# EAGLE board ROM-Adapter1b (EAGLE 9.6.2)
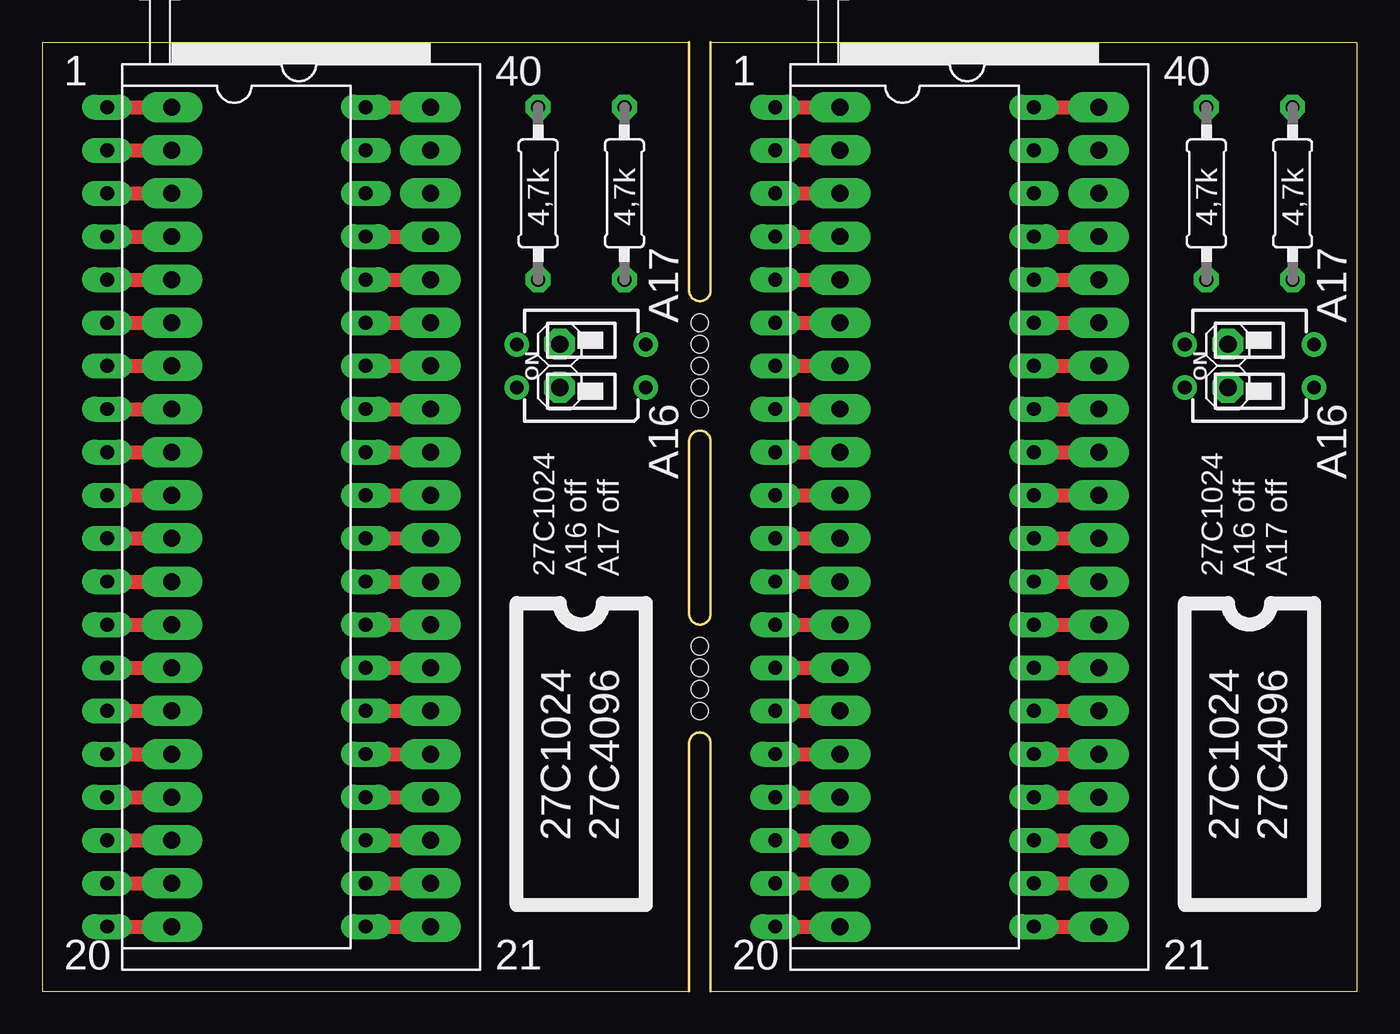
[diagram p0: board, top side]
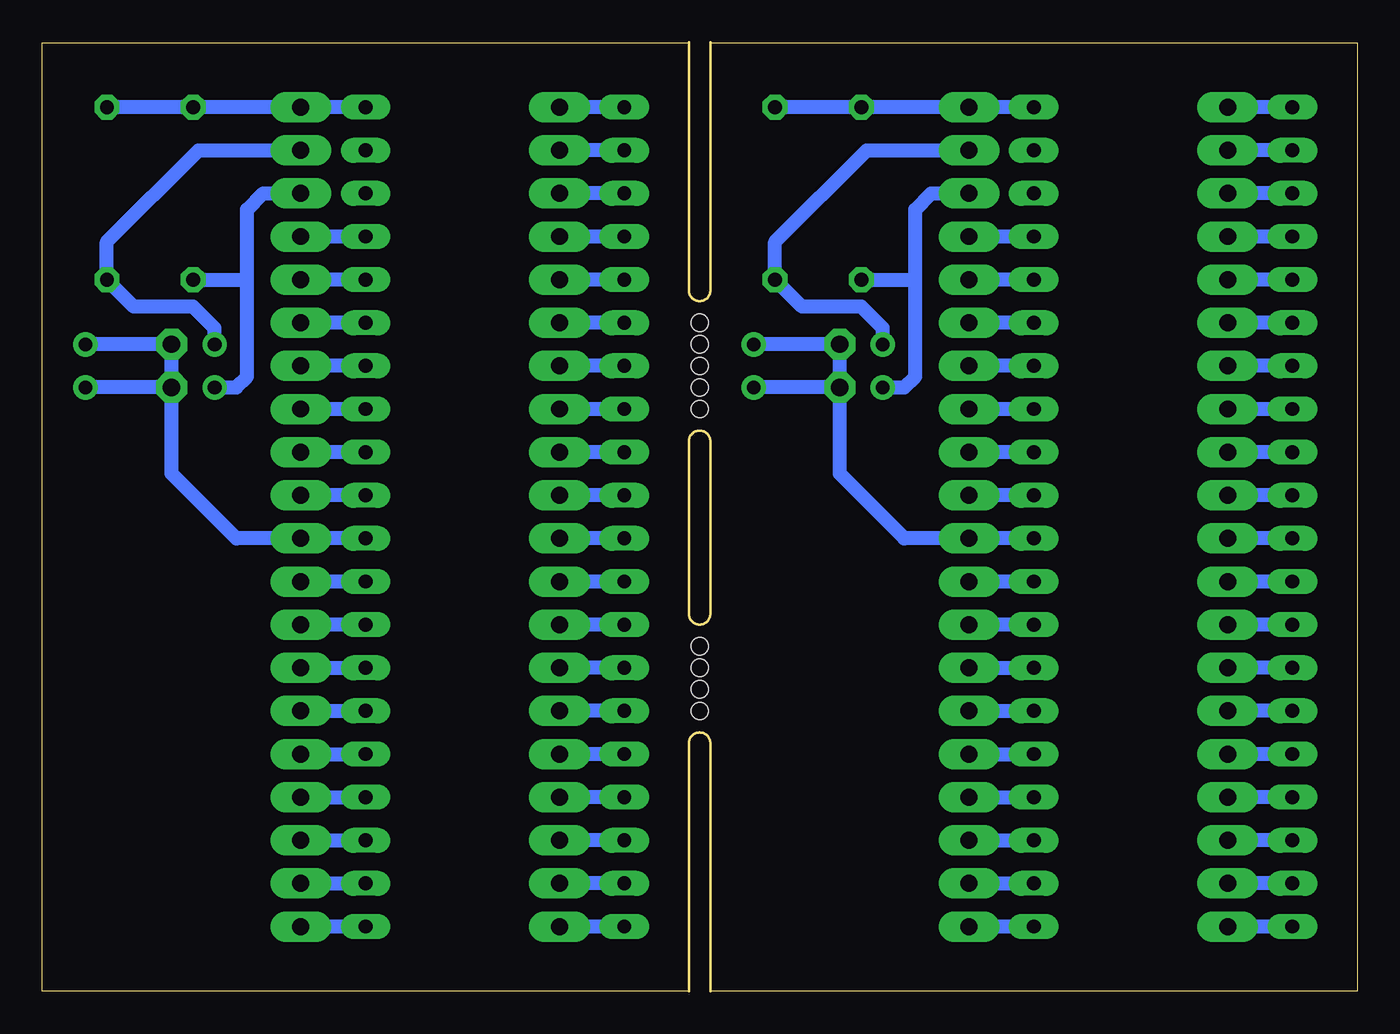
[diagram p1: board, bottom side, seen from below]

Size 77.46 x 55.88 mm. Coordinates in mm from the lower left corner, seen from the top.
Outline: 38.09,0 0,0 0,55.87 38.09,55.87
Outline: 39.37,55.87 77.46,55.87 77.46,0 39.37,0 39.37,14.61 arc180 38.1,14.61 38.1,0
Outline: 38.1,55.88 38.1,41.27 arc180 39.37,41.27 39.37,55.88
Outline: 39.37,22.23 arc-180 38.1,22.23 38.1,32.38 arc-180 39.37,32.38 39.37,22.23
Copper layers (1*16): Top 0.035mm / dielectric 1.6mm / Bottom 0.035mm
Design rules "jlcpcb-2layers": minimum track width 5mil, minimum drill 0.3mm, track to track 5mil, track to pad 5mil, pad to pad 5mil, via to via 5mil, smd to smd 5mil, copper to edge 0.2mm, drill to drill 6mil, minimum pad ring 10mil, minimum via ring 3mil, stop-mask expansion 4mil, vias tented up to drill 0mil, thermal gap 10mil
Holes 1 mm at 38.73,16.51 38.73,17.78 38.73,19.05 38.73,20.32 38.73,39.37 38.73,38.1 38.73,36.83 38.73,35.56 38.73,34.29

## Footprints (pad centres in the part's own frame; a part is rotated, then mirrored left to right if it is on the bottom)
DIL40 = drill 0.813 long: 1 -24.13,-7.62; 2 -21.59,-7.62; 3 -19.05,-7.62; 4 -16.51,-7.62; 5 -13.97,-7.62; 6 -11.43,-7.62; 7 -8.89,-7.62; 8 -6.35,-7.62; 9 -3.81,-7.62; 10 -1.27,-7.62; 11 1.27,-7.62; 12 3.81,-7.62; 13 6.35,-7.62; 14 8.89,-7.62; 15 11.43,-7.62; 16 13.97,-7.62; 17 16.51,-7.62; 18 19.05,-7.62; 19 21.59,-7.62; 20 24.13,-7.62; 21 24.13,7.62; 22 21.59,7.62; 23 19.05,7.62; 24 16.51,7.62; 25 13.97,7.62; 26 11.43,7.62; 27 8.89,7.62; 28 6.35,7.62; 29 3.81,7.62; 30 1.27,7.62; 31 -1.27,7.62; 32 -3.81,7.62; 33 -6.35,7.62; 34 -8.89,7.62; 35 -11.43,7.62; 36 -13.97,7.62; 37 -16.51,7.62; 38 -19.05,7.62; 39 -21.59,7.62; 40 -24.13,7.62
MEMORY-HITACHI_ZIF40 = drill 1 long: 1 -24.13,-7.62; 2 -21.59,-7.62; 3 -19.05,-7.62; 4 -16.51,-7.62; 5 -13.97,-7.62; 6 -11.43,-7.62; 7 -8.89,-7.62; 8 -6.35,-7.62; 9 -3.81,-7.62; 10 -1.27,-7.62; 11 1.27,-7.62; 12 3.81,-7.62; 13 6.35,-7.62; 14 8.89,-7.62; 15 11.43,-7.62; 16 13.97,-7.62; 17 16.51,-7.62; 18 19.05,-7.62; 19 21.59,-7.62; 20 24.13,-7.62; 21 24.13,7.62; 22 21.59,7.62; 23 19.05,7.62; 24 16.51,7.62; 25 13.97,7.62; 26 11.43,7.62; 27 8.89,7.62; 28 6.35,7.62; 29 3.81,7.62; 30 1.27,7.62; 31 -1.27,7.62; 32 -3.81,7.62; 33 -6.35,7.62; 34 -8.89,7.62; 35 -11.43,7.62; 36 -13.97,7.62; 37 -16.51,7.62; 38 -19.05,7.62; 39 -21.59,7.62; 40 -24.13,7.62
1X01 = drill 1.016 octagon: 1 0,0
0207/10 = drill 0.813 octagon: 1 -5.08,0; 2 5.08,0
DIPSWITCH-02-209-2LPST = drill 0.8: 1 -1.27,-3.81; 2 1.27,-3.81; 3 1.27,3.81; 4 -1.27,3.81

## Placement (x,y rotation side)
IC1  Sockel40  [DIL40]  50.8,27.94 270 top
IC2  ZIF40  [MEMORY-HITACHI_ZIF40]  54.61,27.94 270 top
IC3  Sockel40  [DIL40]  11.43,27.94 270 top
IC4  ZIF40  [MEMORY-HITACHI_ZIF40]  15.24,27.94 270 top
JP1  [1X01]  30.48,38.1 0 top
JP2  [1X01]  30.48,35.56 0 top
JP3  [1X01]  69.85,38.1 0 top
JP4  [1X01]  69.85,35.56 0 top
R1  4,7k  [0207/10]  29.21,46.99 270 top
R2  4,7k  [0207/10]  34.29,46.99 270 top
R3  4,7k  [0207/10]  68.58,46.99 270 top
R4  4,7k  [0207/10]  73.66,46.99 270 top
S1  DIP-02-PTH-100MIL  [DIPSWITCH-02-209-2LPST]  31.75,36.83 90 top
S2  DIP-02-PTH-100MIL  [DIPSWITCH-02-209-2LPST]  71.12,36.83 90 top

## Library data of the parts
IC1 IC3 = memory-hitachi; OC_FARNELL: unknown; OC_NEWARK: unknown
IC2 IC4 = ROM-Adapter
JP1-JP4 = pinhead
R1-R4 = rcl; SPICEPREFIX: R
S1 S2 = SparkFun-Switches; PROD_ID: SWCH-12532

## Nets
N$1: IC3.21 IC4.21
N$2: IC3.22 IC4.22
N$3: IC3.23 IC4.23
N$4: IC3.24 IC4.24
N$5: IC3.25 IC4.25
N$6: IC3.26 IC4.26
N$7: IC3.27 IC4.27
N$8: IC3.28 IC4.28
N$9: IC3.29 IC4.29
N$10: IC3.31 IC4.31
N$11: IC3.32 IC4.32
N$12: IC3.33 IC4.33
N$13: IC3.34 IC4.34
N$14: IC3.35 IC4.35
N$15: IC3.36 IC4.36
N$16: IC3.37 IC4.37
N$17: IC3.20 IC4.20
N$18: IC3.2 IC4.2
N$19: IC4.38 R1.2 S1.4
N$20: IC3.19 IC4.19
N$21: IC3.18 IC4.18
N$22: IC3.17 IC4.17
N$23: IC3.16 IC4.16
N$24: IC3.15 IC4.15
N$25: IC3.14 IC4.14
N$26: IC3.13 IC4.13
N$27: IC3.12 IC4.12
N$28: IC3.10 IC4.10
N$29: IC3.9 IC4.9
N$30: IC3.8 IC4.8
N$31: IC3.7 IC4.7
N$32: IC3.6 IC4.6
N$33: IC3.5 IC4.5
N$34: IC3.4 IC4.4
N$35: IC3.3 IC4.3
N$36: IC4.39 R2.2 S1.3
N$37: IC3.1 IC4.1
N$38: IC3.40 IC4.40 R1.1 R2.1
N$39: IC1.21 IC2.21
N$40: IC3.11 IC4.11
N$41: IC1.22 IC2.22
N$42: IC3.30 IC4.30 JP1.1 JP2.1 S1.1 S1.2
N$43: IC1.23 IC2.23
N$44: IC1.24 IC2.24
N$45: IC1.25 IC2.25
N$46: IC1.26 IC2.26
N$47: IC1.27 IC2.27
N$48: IC1.28 IC2.28
N$49: IC1.29 IC2.29
N$50: IC1.31 IC2.31
N$51: IC1.32 IC2.32
N$52: IC1.33 IC2.33
N$53: IC1.34 IC2.34
N$54: IC1.35 IC2.35
N$55: IC1.36 IC2.36
N$56: IC1.37 IC2.37
N$57: IC1.20 IC2.20
N$58: IC1.2 IC2.2
N$59: IC1.19 IC2.19
N$60: IC1.18 IC2.18
N$61: IC1.17 IC2.17
N$62: IC1.16 IC2.16
N$63: IC1.15 IC2.15
N$64: IC1.14 IC2.14
N$65: IC1.13 IC2.13
N$66: IC1.12 IC2.12
N$67: IC1.10 IC2.10
N$68: IC1.9 IC2.9
N$69: IC1.8 IC2.8
N$70: IC1.7 IC2.7
N$71: IC1.6 IC2.6
N$72: IC1.5 IC2.5
N$73: IC1.4 IC2.4
N$74: IC1.3 IC2.3
N$75: IC1.1 IC2.1
N$76: IC1.40 IC2.40 R3.1 R4.1
N$77: IC1.11 IC2.11
N$78: IC2.38 R3.2 S2.4
N$79: IC2.39 R4.2 S2.3
N$80: IC1.30 IC2.30 JP3.1 JP4.1 S2.1 S2.2

## Tracks (layer width: path | path; a pad name or v marks a point on that pad's centre or on a via)
N$1
  Top 0.813: IC3.21 IC4.21
  Bottom 0.813: IC3.21 IC4.21
N$2
  Top 0.813: IC3.22 IC4.22
  Bottom 0.813: IC4.22 IC3.22
N$3
  Top 0.813: IC3.23 IC4.23
  Bottom 0.813: IC4.23 IC3.23
N$4
  Top 0.813: IC3.24 IC4.24
  Bottom 0.813: IC4.24 IC3.24
N$5
  Top 0.813: IC3.25 IC4.25
  Bottom 0.813: IC4.25 IC3.25
N$6
  Top 0.813: IC3.26 IC4.26
  Bottom 0.813: IC4.26 IC3.26
N$7
  Top 0.813: IC3.27 IC4.27
  Bottom 0.813: IC4.27 IC3.27
N$8
  Top 0.813: IC3.28 IC4.28
  Bottom 0.813: IC3.28 IC4.28
N$9
  Top 0.813: IC3.29 IC4.29
  Bottom 0.813: IC3.29 IC4.29
N$10
  Top 0.813: IC3.31 IC4.31
  Bottom 0.813: IC3.31 IC4.31
N$11
  Top 0.813: IC3.32 IC4.32
  Bottom 0.813: IC3.32 IC4.32
N$12
  Top 0.813: IC3.33 IC4.33
  Bottom 0.813: IC3.33 IC4.33
N$13
  Top 0.813: IC3.34 IC4.34
  Bottom 0.813: IC3.34 IC4.34
N$14
  Top 0.813: IC3.35 IC4.35
  Bottom 0.813: IC3.35 IC4.35
N$15
  Top 0.813: IC3.36 IC4.36
  Bottom 0.813: IC3.36 IC4.36
N$16
  Top 0.813: IC3.37 IC4.37
  Bottom 0.813: IC3.37 IC4.37
N$17
  Top 0.813: IC3.20 IC4.20
  Bottom 0.813: IC3.20 IC4.20
N$18
  Top 0.813: IC3.2 IC4.2
  Bottom 0.813: IC3.2 IC4.2
N$19
  Bottom 0.813: S1.4 26.67,35.56 26.04,36.2 26.04,41.91 | IC4.38 25.08,46.99 26.04,46.04 26.04,41.91 | R1.2 26.04,41.91
N$20
  Top 0.813: IC3.19 IC4.19
  Bottom 0.813: IC3.19 IC4.19
N$21
  Top 0.813: IC3.18 IC4.18
  Bottom 0.813: IC3.18 IC4.18
N$22
  Top 0.813: IC3.17 IC4.17
  Bottom 0.813: IC3.17 IC4.17
N$23
  Top 0.813: IC3.16 IC4.16
  Bottom 0.813: IC3.16 IC4.16
N$24
  Top 0.813: IC3.15 IC4.15
  Bottom 0.813: IC3.15 IC4.15
N$25
  Top 0.813: IC3.14 IC4.14
  Bottom 0.813: IC3.14 IC4.14
N$26
  Top 0.813: IC3.13 IC4.13
  Bottom 0.813: IC3.13 IC4.13
N$27
  Top 0.813: IC3.12 IC4.12
  Bottom 0.813: IC3.12 IC4.12
N$28
  Top 0.813: IC3.10 IC4.10
  Bottom 0.813: IC3.10 IC4.10
N$29
  Top 0.813: IC3.9 IC4.9
  Bottom 0.813: IC3.9 IC4.9
N$30
  Top 0.813: IC3.8 IC4.8
  Bottom 0.813: IC3.8 IC4.8
N$31
  Top 0.813: IC3.7 IC4.7
  Bottom 0.813: IC3.7 IC4.7
N$32
  Top 0.813: IC3.6 IC4.6
  Bottom 0.813: IC3.6 IC4.6
N$33
  Top 0.813: IC3.5 IC4.5
  Bottom 0.813: IC3.5 IC4.5
N$34
  Top 0.813: IC3.4 IC4.4
  Bottom 0.813: IC3.4 IC4.4
N$35
  Top 0.813: IC3.3 IC4.3
  Bottom 0.813: IC3.3 IC4.3
N$36
  Bottom 0.813: S1.3 27.94,39.05 29.21,40.32 32.7,40.32 R2.2 34.29,44.13 28.89,49.53 IC4.39
N$37
  Top 0.813: IC3.1 IC4.1
  Bottom 0.813: IC3.1 IC4.1
N$38
  Top 0.813: IC3.40 IC4.40
  Bottom 0.813: IC3.40 IC4.40 R1.1 R2.1
N$39
  Top 0.813: IC1.21 IC2.21
  Bottom 0.813: IC1.21 IC2.21
N$40
  Top 0.813: IC3.11 IC4.11
  Bottom 0.813: IC3.11 IC4.11
N$41
  Top 0.813: IC1.22 IC2.22
  Bottom 0.813: IC2.22 IC1.22
N$42
  Top 0.813: IC3.30 IC4.30
  Bottom 0.813: IC3.30 IC4.30 26.67,26.67 30.48,30.48 JP2.1 | JP2.1 JP1.1 S1.2 | JP2.1 S1.1
N$43
  Top 0.813: IC1.23 IC2.23
  Bottom 0.813: IC2.23 IC1.23
N$44
  Top 0.813: IC1.24 IC2.24
  Bottom 0.813: IC2.24 IC1.24
N$45
  Top 0.813: IC1.25 IC2.25
  Bottom 0.813: IC2.25 IC1.25
N$46
  Top 0.813: IC1.26 IC2.26
  Bottom 0.813: IC2.26 IC1.26
N$47
  Top 0.813: IC1.27 IC2.27
  Bottom 0.813: IC2.27 IC1.27
N$48
  Top 0.813: IC1.28 IC2.28
  Bottom 0.813: IC1.28 IC2.28
N$49
  Top 0.813: IC1.29 IC2.29
  Bottom 0.813: IC1.29 IC2.29
N$50
  Top 0.813: IC1.31 IC2.31
  Bottom 0.813: IC1.31 IC2.31
N$51
  Top 0.813: IC1.32 IC2.32
  Bottom 0.813: IC1.32 IC2.32
N$52
  Top 0.813: IC1.33 IC2.33
  Bottom 0.813: IC1.33 IC2.33
N$53
  Top 0.813: IC1.34 IC2.34
  Bottom 0.813: IC1.34 IC2.34
N$54
  Top 0.813: IC1.35 IC2.35
  Bottom 0.813: IC1.35 IC2.35
N$55
  Top 0.813: IC1.36 IC2.36
  Bottom 0.813: IC1.36 IC2.36
N$56
  Top 0.813: IC1.37 IC2.37
  Bottom 0.813: IC1.37 IC2.37
N$57
  Top 0.813: IC1.20 IC2.20
  Bottom 0.813: IC1.20 IC2.20
N$58
  Top 0.813: IC1.2 IC2.2
  Bottom 0.813: IC1.2 IC2.2
N$59
  Top 0.813: IC1.19 IC2.19
  Bottom 0.813: IC1.19 IC2.19
N$60
  Top 0.813: IC1.18 IC2.18
  Bottom 0.813: IC1.18 IC2.18
N$61
  Top 0.813: IC1.17 IC2.17
  Bottom 0.813: IC1.17 IC2.17
N$62
  Top 0.813: IC1.16 IC2.16
  Bottom 0.813: IC1.16 IC2.16
N$63
  Top 0.813: IC1.15 IC2.15
  Bottom 0.813: IC1.15 IC2.15
N$64
  Top 0.813: IC1.14 IC2.14
  Bottom 0.813: IC1.14 IC2.14
N$65
  Top 0.813: IC1.13 IC2.13
  Bottom 0.813: IC1.13 IC2.13
N$66
  Top 0.813: IC1.12 IC2.12
  Bottom 0.813: IC1.12 IC2.12
N$67
  Top 0.813: IC1.10 IC2.10
  Bottom 0.813: IC1.10 IC2.10
N$68
  Top 0.813: IC1.9 IC2.9
  Bottom 0.813: IC1.9 IC2.9
N$69
  Top 0.813: IC1.8 IC2.8
  Bottom 0.813: IC1.8 IC2.8
N$70
  Top 0.813: IC1.7 IC2.7
  Bottom 0.813: IC1.7 IC2.7
N$71
  Top 0.813: IC1.6 IC2.6
  Bottom 0.813: IC1.6 IC2.6
N$72
  Top 0.813: IC1.5 IC2.5
  Bottom 0.813: IC1.5 IC2.5
N$73
  Top 0.813: IC1.4 IC2.4
  Bottom 0.813: IC1.4 IC2.4
N$74
  Top 0.813: IC1.3 IC2.3
  Bottom 0.813: IC1.3 IC2.3
N$75
  Top 0.813: IC1.1 IC2.1
  Bottom 0.813: IC1.1 IC2.1
N$76
  Top 0.813: IC1.40 IC2.40
  Bottom 0.813: IC1.40 IC2.40 R3.1 R4.1
N$77
  Top 0.813: IC1.11 IC2.11
  Bottom 0.813: IC1.11 IC2.11
N$78
  Bottom 0.813: S2.4 66.04,35.56 65.41,36.2 65.41,41.91 | IC2.38 64.45,46.99 65.41,46.04 65.41,41.91 | R3.2 65.41,41.91
N$79
  Bottom 0.813: S2.3 67.31,39.05 68.58,40.32 72.07,40.32 R4.2 73.66,44.13 68.26,49.53 IC2.39
N$80
  Top 0.813: IC1.30 IC2.30
  Bottom 0.813: IC1.30 IC2.30 66.04,26.67 69.85,30.48 JP4.1 | JP4.1 JP3.1 S2.2 | JP4.1 S2.1

## Text on the board
tPlace: 1 | 40 | 1 | 40 | 4,7k | 4,7k | 4,7k | 4,7k | A17 | A17 | A16 | A16 | 27C1024 / A16 off / A17 off | 27C1024 / A16 off / A17 off | 27C1024 | 27C4096 | 27C1024 | 27C4096 | 20 | 21 | 20 | 21